# Altium PCB sensorTest.PcbDoc
Units mil, origin at the board's own origin, x right, y up, seen from the top; angles counter-clockwise.
Board outline 3300 x 2970 mil, 2 copper layers (Top Layer, Bottom Layer); 44 components, 33 nets, 167 pads, 15 vias.
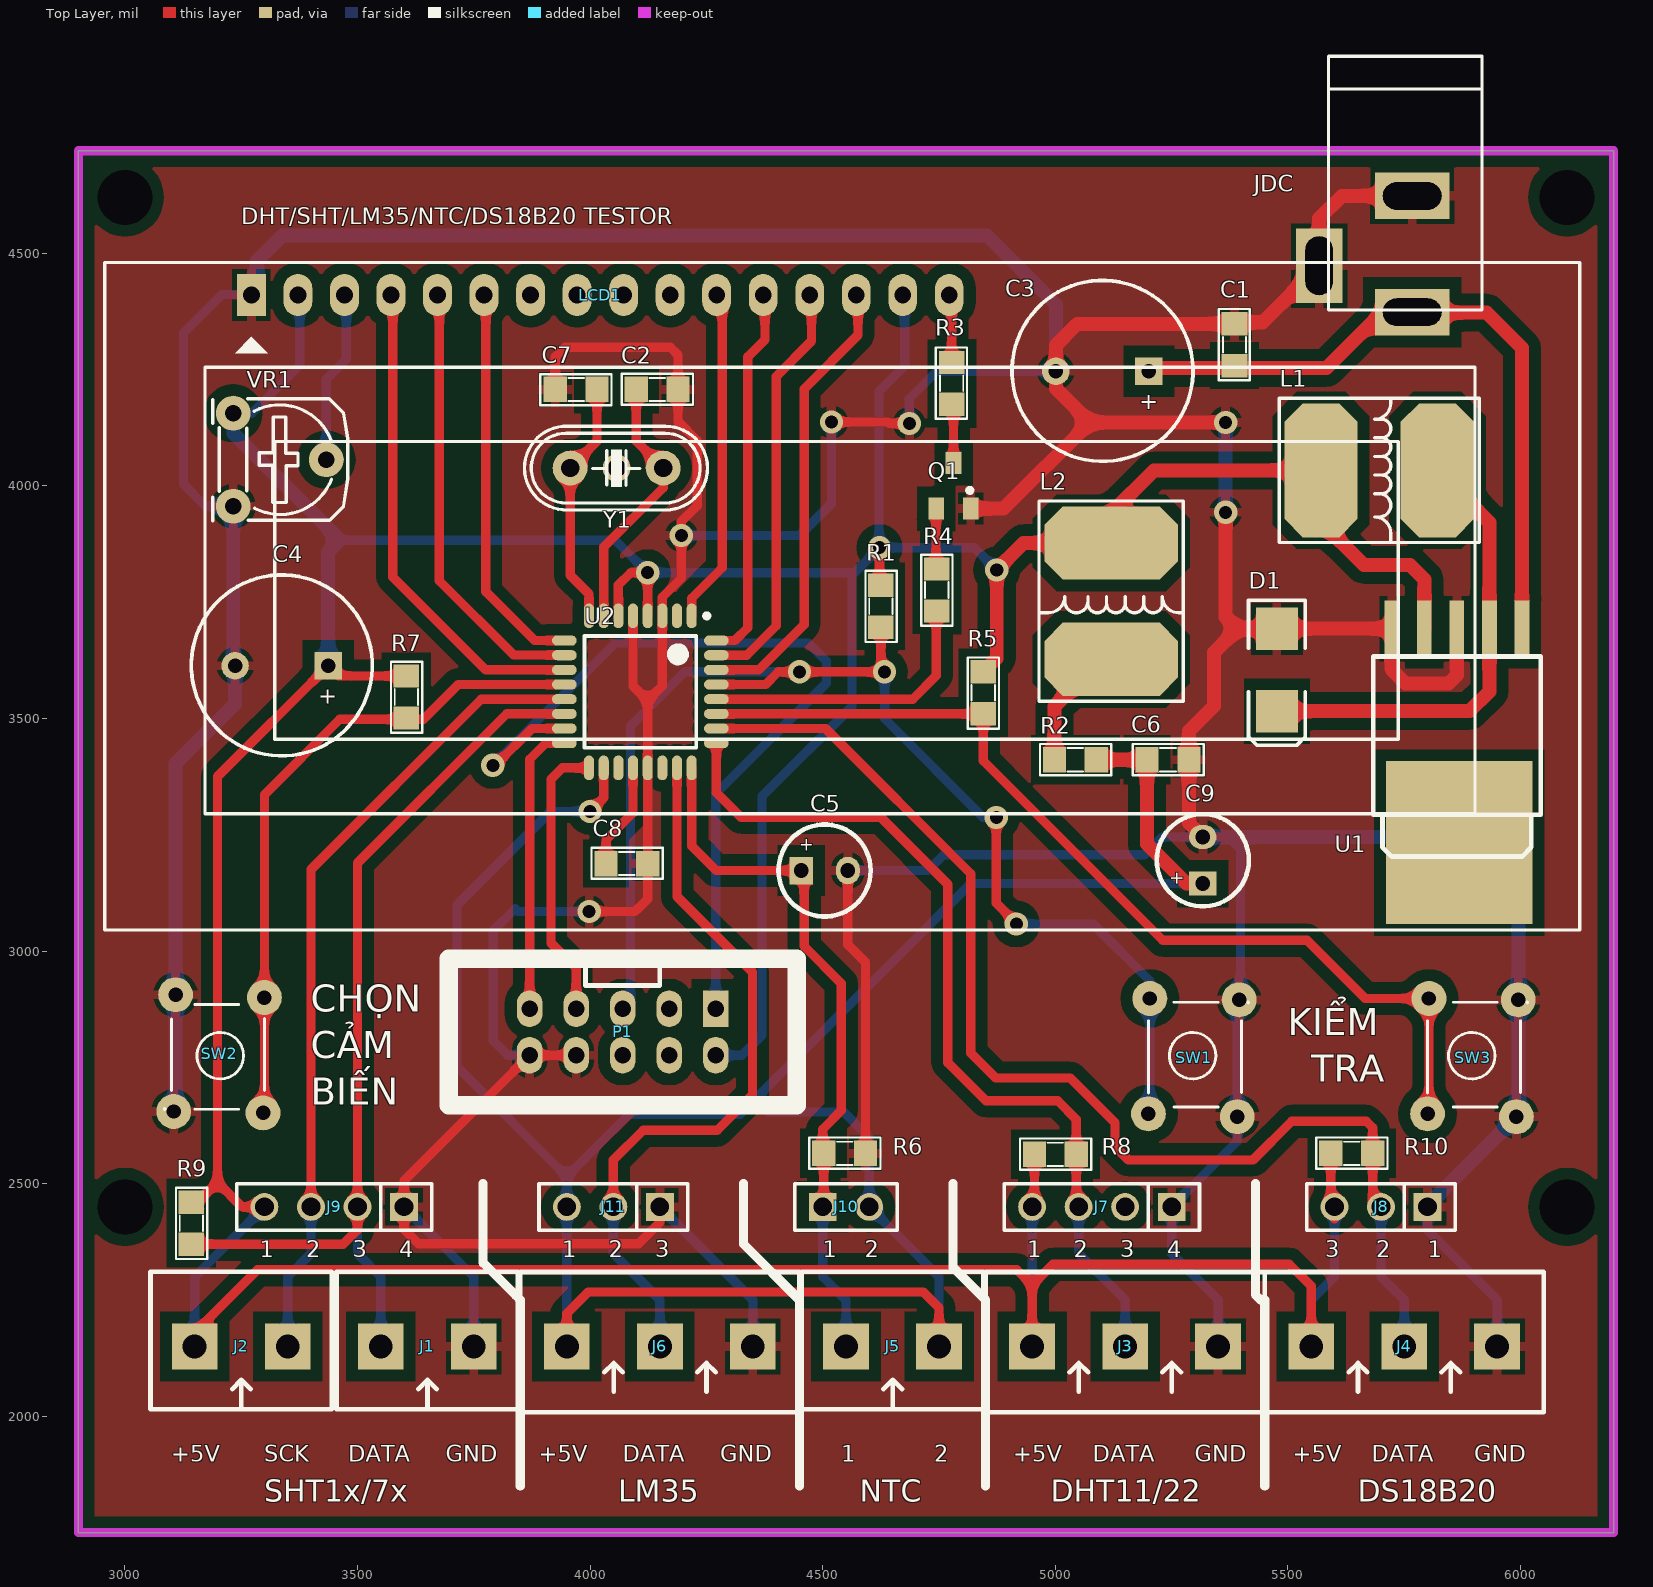
[diagram p0: Top Layer view]
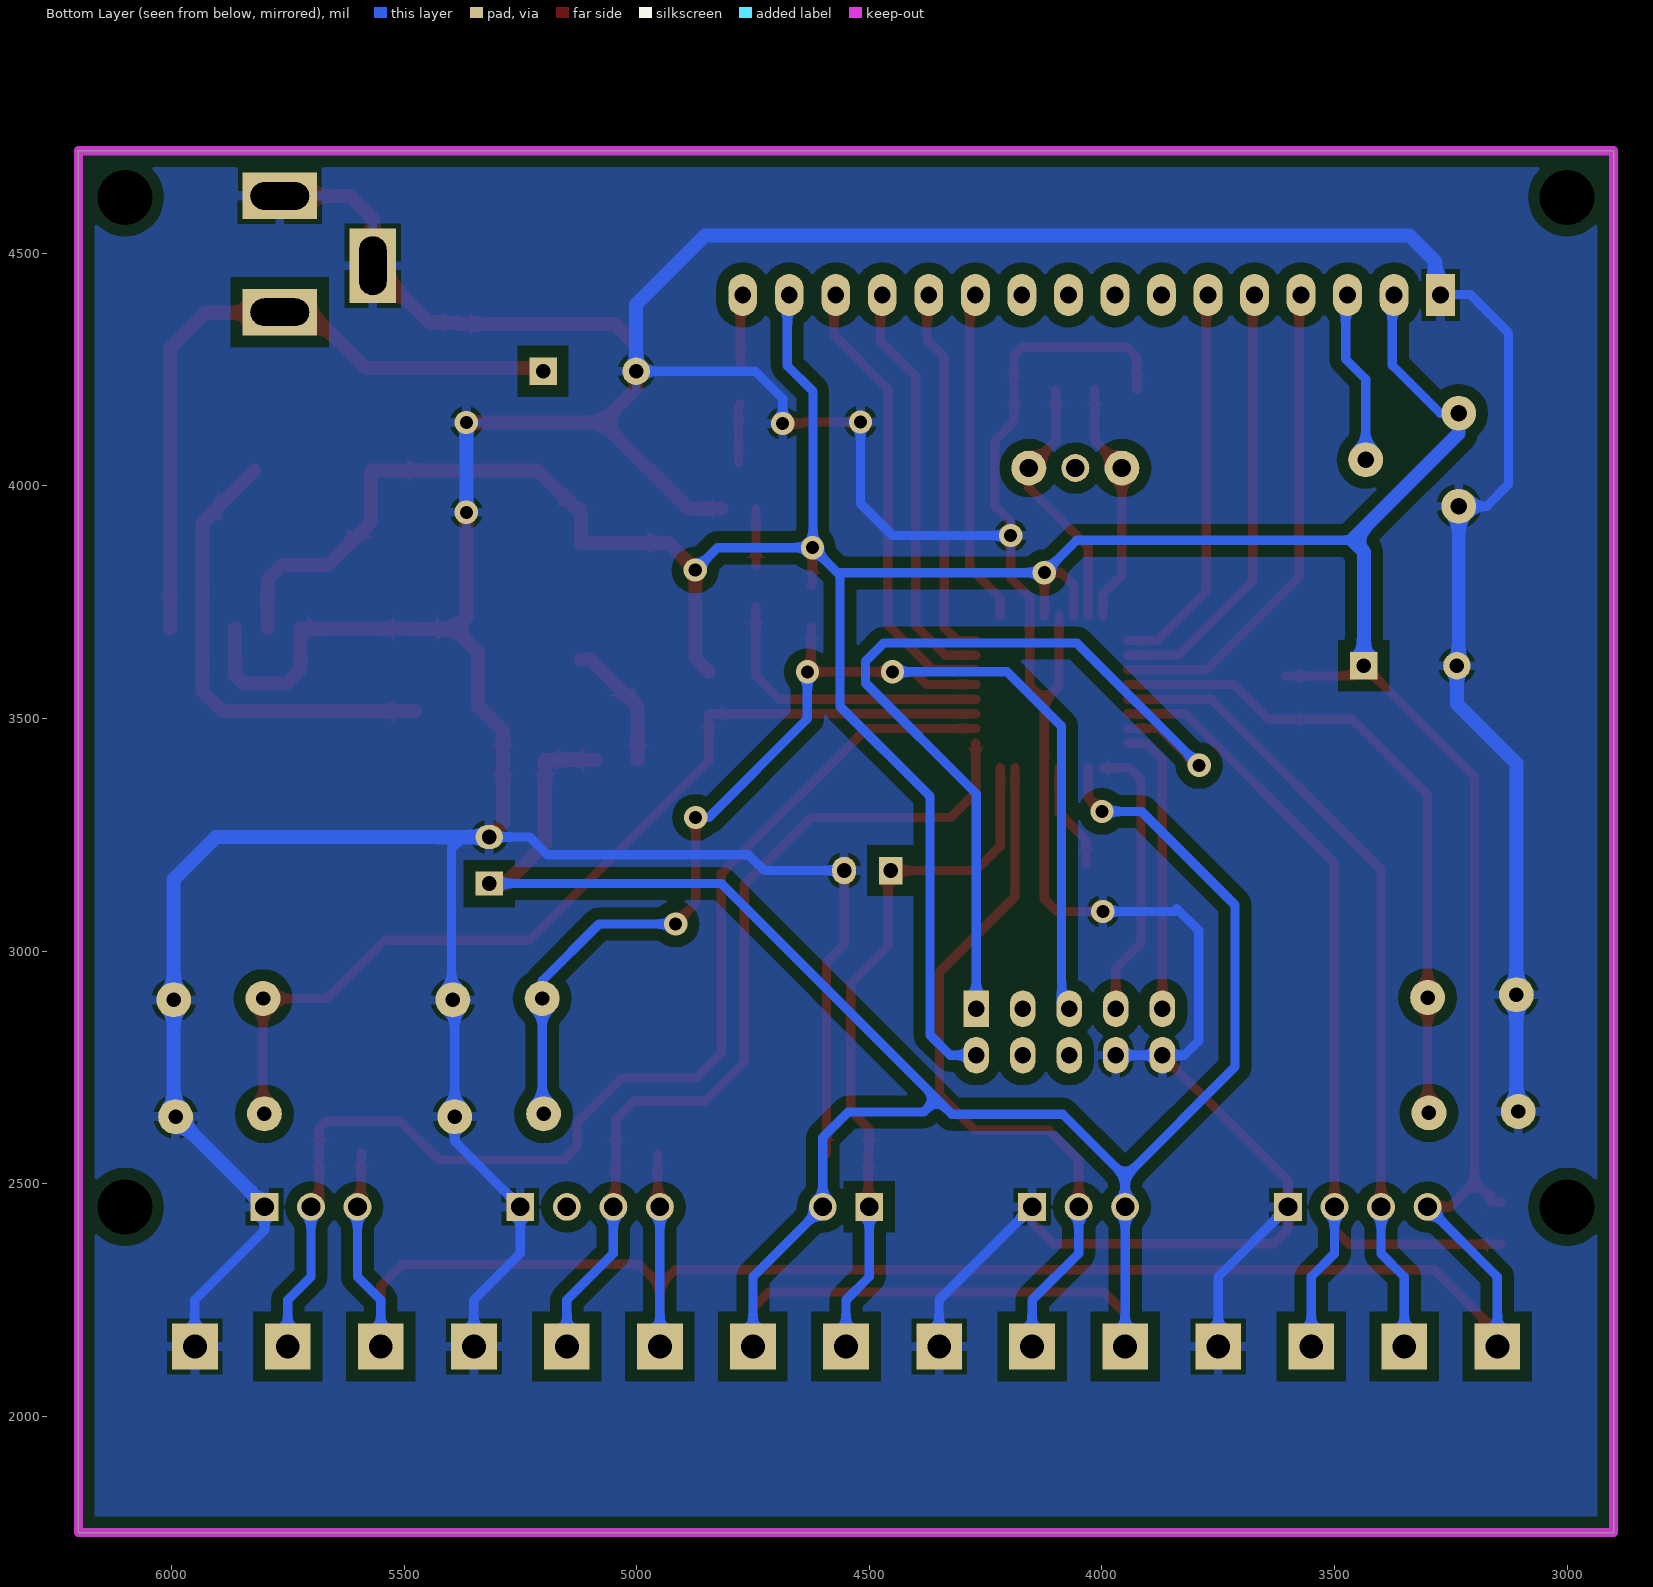
[diagram p1: Bottom Layer view, seen from below]
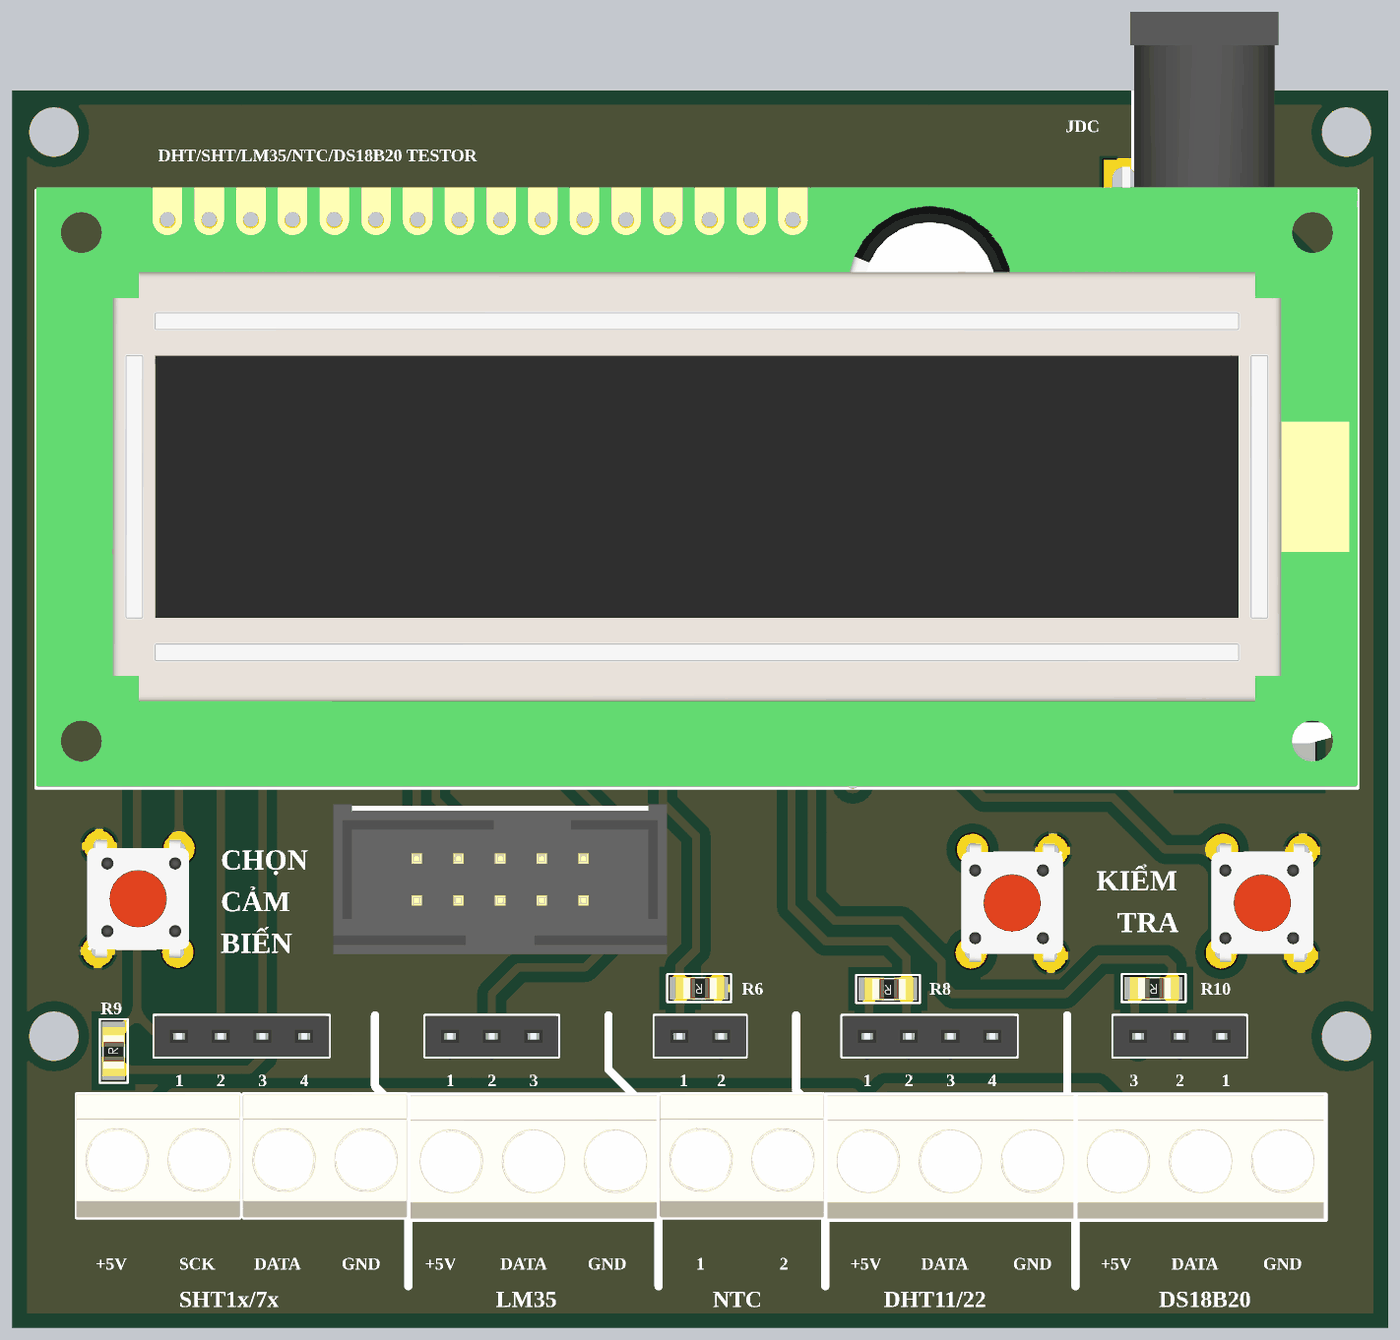
[diagram p2: 3D render of the assembled board from above, using the file's embedded part models]

## Layer stack, top to bottom
Top Solder: solder mask 0.4, Solder Resist, Dk 3.5
Top Layer: signal copper 1.4
Dielectric 1: dielectric 12.6, FR-4, Dk 4.8
Bottom Layer: signal copper 1.4
Bottom Solder: solder mask 0.4, Solder Resist, Dk 3.5

## Board outline
2900,1750 2900,4720 6200,4720 6200,1750

## Design rules (kind name [scope] priority, off if disabled: settings)
Clearance Clearance_2 [InNamedPolygon('Top-GND')] p1: gap=25
Clearance Clearance_1 [InNamedPolygon('Bottom-GND')] p2: gap=25
Clearance [All] p3: gap=30
PolygonConnect PolygonConnect_5 [All vs IsNamedPolygon('Bottom-GND')] p1: connectstyle=Relief reliefconductorwidth=20 reliefentries=4 polygonreliefangle="90 Angle" airgapwidth=10
PolygonConnect PolygonConnect_4 [All vs IsNamedPolygon('Top-GND')] p2: connectstyle=Relief reliefconductorwidth=20 reliefentries=4 polygonreliefangle="90 Angle" airgapwidth=10
PolygonConnect PolygonConnect_3 [All vs IsNamedPolygon('TOP')] p3: connectstyle=Direct reliefconductorwidth=10 reliefentries=4 polygonreliefangle="90 Angle" airgapwidth=10
PolygonConnect PolygonConnect_2 [All vs IsNamedPolygon('TOP')] p4: connectstyle=Direct reliefconductorwidth=10 reliefentries=4 polygonreliefangle="90 Angle" airgapwidth=10
PolygonConnect PolygonConnect_1 [All vs IsNamedPolygon('BOTTOM')] p5: connectstyle=Direct reliefconductorwidth=10 reliefentries=4 polygonreliefangle="90 Angle" airgapwidth=10
PolygonConnect [All] p6: connectstyle=Relief reliefconductorwidth=10 reliefentries=4 polygonreliefangle="90 Angle" airgapwidth=10
RoomDefinition sensorTest [InComponentClass('sensorTest')] p1: confinementstyle=ConfineIn formatcopy=TRUE lockcomponents=FALSE outline 0,0 2000,0 2000,1000 0,1000
RoutingVias [All] p1: holewidth=28 width=50 viastyle="Through Hole" minholewidth=28 minwidth=50 maxholewidth=28 maxwidth=50
SolderMaskExpansion [All] p1: expansion=4
Width [All] p1: maxlimit=50 minlimit=10 preferedwidth=10
30 further rules are at their usual default settings.

## Components (designator, comment, footprint, x,y, rotation, side; value= is the part's Value field where it differs from the comment)
C1 "100nF" "Tu 0805" 5385,4303 r270 top
C2 "22pF" "Tu 0805" 4144,4207 r180 top
C3 "680uF" C10mm 5101,4246 r180 top
C4 "220uF" C10mm 3337,3613 r180 top
C5 "10uF" C5mm 4504,3173 r0 top
C6 "100nF" "Tu 0805" 5242,3411 r180 top
C7 "22pF" "Tu 0805" 3970,4207 r0 top
C8 "100nF" "Tu 0805" 4079,3188 r180 top
C9 "10uF" C5mm 5317,3195 r90 top
D1 "SS34" SMB 5476,3604 r270 top
J1 "SHT" KF2-5.08 3650,2150 r180 top
J2 "SHT" KF2-5.08 3250,2150 r180 top
J3 "DHT" KF3-5.08 4950,2150 r0 top
J4 "DS18" KF3-5.08 5550,2150 r0 top
J5 "NTC" KF2-5.08 4650,2150 r180 top
J6 "LM35" KF3-5.08 3950,2150 r0 top
J7 "DHT" JP4-C1T 5250,2450 r180 top
J8 "DS18" JP3-C1T 5800,2450 r180 top
J9 "JP4" JP4-C1T 3600,2450 r180 top
J10 "NTC" JP2-C1T 4500,2450 r0 top
J11 "JP3" JP3-C1T 4150,2450 r180 top
JDC "9VDC" DC-IN 5667,4498 r270 top
L1 "100uH" "Cuon Cam 7.5x7x5" 5846,4033 r90 top
L2 "100uH" "Cuon Cam 7.5x7x5" 5120,3602 r0 top
LCD1 "LCD16x2A" LCD16X2 3272,4410 r0 top
P1 "CABLE 10" "CABLE 10" 4270,2876 r180 top
Q1 "C1815" SOT23B 4781,4000 r0 top
R1 "10k" "Tro SMD 0805" 4625,3741 r90 top
R2 "10" "Tro SMD 0805" 5043,3411 r180 top
R3 "10" "Tro SMD 0805" 4777,4220 r270 top
R4 "2k7" "Tro SMD 0805" 4745,3776 r90 top
R5 "10k" "Tro SMD 0805" 4845,3555 r90 top
R6 "10k" "Tro SMD 0805" 4547,2565 r180 top
R7 "10k" "Tro SMD 0805" 3605,3546 r90 top
R8 "5k" "Tro SMD 0805" 5000,2563 r180 top
R9 "10k" "Tro SMD 0805" 3143,2415 r90 top
R10 "5k" "Tro SMD 0805" 5637,2565 r180 top
SW1 "SW" SW4 5200,2650 r90 top
SW2 "SW" SW4 3300,2900 r270 top
SW3 "SW" SW4 5800,2650 r90 top
U1 "LM2576T-5.0" LM2576SSMD 6043,3633 r180 top
U2 "ATmega8-16AC" 32A_L 4108,3557 r270 top
VR1 "10K" VR 3233,4156 r270 top
Y1 "16MHz" XT2 4057,4038 r0 top

## Footprints (in the part's own frame and the unit in brackets; to place one, negate y for a bottom-side part, rotate by r counter-clockwise, add the part's x,y. Pads: shape width x height; smd on the part's side, far side on the other; paste and mask are expansions set on the pad)
32A_L [mm] "Thin QFP, 32-Leads, Body 7x7mm, Pitch 0.8mm, IPC High Density"
  oval 1.35x0.55 smd: 1(-4.15,2.8) 2(-4.15,2) 3(-4.15,1.2) 4(-4.15,0.4) 5(-4.15,-0.4) 6(-4.15,-1.2) 7(-4.15,-2) 8(-4.15,-2.8) 17(4.15,-2.8) 18(4.15,-2) 19(4.15,-1.2) 20(4.15,-0.4) 21(4.15,0.4) 22(4.15,1.2) 23(4.15,2) 24(4.15,2.8)
  oval 0.55x1.35 smd: 9(-2.8,-4.15) 10(-2,-4.15) 11(-1.2,-4.15) 12(-0.4,-4.15) 13(0.4,-4.15) 14(1.2,-4.15) 15(2,-4.15) 16(2.8,-4.15) 25(2.8,4.15) 26(2,4.15) 27(1.2,4.15) 28(0.4,4.15) 29(-0.4,4.15) 30(-1.2,4.15) 31(-2,4.15) 32(-2.8,4.15)
  silkscreen extent -4.27,-3.05 3.05,3.75, body extent -3.5,-3.5 3.5,3.5, height 1.2
C5mm [mm]
  rect 1.3x1.5 hole 0.8: 1(-1.27,0)
  oval 1.3x1.5 hole 0.8: 2(1.27,0)
  silkscreen extent -2.51,-2.51 2.51,2.51, body extent -2.5,-2.5 2.49,2.5, height 11.01
C10mm [mm]
  rect 1.5x1.5 hole 0.8: 1(-2.54,0)
  round 1.5 hole 0.8: 2(2.54,0)
  silkscreen extent -4.95,-4.96 4.93,4.92, body extent -5,-5 4.97,5, height 20.01
"CABLE 10" [mm] "Connector; Header; 5x2 Position"
  rect 1.4x2 hole 0.9: 1(0,0)
  oval 1.4x2 hole 0.9: 2(0,2.54) 3(2.54,0) 4(2.54,2.54) 5(5.08,0) 6(5.08,2.54) 7(7.62,0) 8(7.62,2.54) 9(10.16,0) 10(10.16,2.54)
  silkscreen extent -4.42,-2.73 14.58,5.27, body extent -5.08,-3.3 15.24,5.84, height 9.86
"Cuon Cam 7.5x7x5" [mm]
  oct 7.3x4 smd: 1(0,0.635) 2(0,6.985)
  silkscreen extent -3.94,-1.65 3.94,9.27, body extent -3.5,0.07 3.5,7.8, height 5.02
DC-IN [mil] "Jac DC input"
  rect 100x160 hole 59.06 slot 125.98 at 90 deg: 1(125,100) 2(-125,100)
  rect 160x100 hole 59.06 slot 125.98 at 0 deg: 3(25,-100)
  silkscreen extent -425,-80 120,250, body extent -410,-105 134,269, height 434
JP2-C1T [mm] "2 row, straight, gold plating"
  rect 1.52x1.52 hole 1.02: 1(0,0)
  round 1.52 hole 1.02: 2(2.54,0)
  silkscreen extent -1.52,-1.27 4.06,1.27, body extent -1.52,-1.25 4.06,1.25, height 8.51
JP3-C1T [mm] "3 row, straight, gold plating"
  rect 1.52x1.52 hole 1.02: 1(0,0)
  round 1.52 hole 1.02: 2(2.54,0) 3(5.08,0)
  silkscreen extent -1.52,-1.27 6.6,1.27, body extent -1.52,-1.25 6.6,1.25, height 8.51
JP4-C1T [mm] "4 row, straight, gold plating"
  rect 1.52x1.52 hole 1.02: 1(0,0)
  round 1.52 hole 1.02: 2(2.54,0) 3(5.08,0) 4(7.62,0)
  silkscreen extent -1.52,-1.27 9.14,1.27, body extent -1.52,-1.25 9.14,1.25, height 8.51
KF2-5.08 [mm]
  rect 2.5x2.5 hole 1.3: 1(-2.54,0) 2(2.54,0)
  silkscreen extent -4.95,-4.08 4.95,3.43, body extent -5,-4.07 5,3.43, height 10
KF3-5.08 [mm]
  rect 2.5x2.5 hole 1.3: 1(0,0) 2(5.08,0) 3(10.147,0)
  silkscreen extent -2.54,-3.58 12.7,4.06, body extent -2.42,-3.51 12.58,3.99, height 10
LCD16X2 [mil] "LCD dipslay 16x2, 16 pin"
  rect 62x90 hole 36: 1(0,0)
  oval 62x90 hole 36: 2(100,0) 3(200,0) 4(300,0) 5(400,0) 6(500,0) 7(600,0) 8(700,0) 9(800,0) 10(900,0) 11(1000,0) 12(1100,0) 13(1200,0) 14(1300,0) 15(1400,0) 16(1500,0)
  silkscreen extent -315,-1365 2855,70, body extent -315,-1360 2855,77, height 886
LM2576SSMD [mil]
  rect 31.5x120 smd: 1(40,-60) 2(110,-60) 3(180,-60) 4(250,-60) 5(320,-60)
  rect 314.96x350 smd: 6(175,400)
  silkscreen extent 0,0 360,430, body extent -20,-72 380,480, height 180
SMB [mm] "DO-214-AA/SMB; 2 C-Bend Leads; Body 5.3 x 3.6 mm, inc. leads (LxW)"
  rect 2.3x2.3 smd: 1(-2.25,0) 2(2.25,0)
  silkscreen extent -3.8,-1.55 4.1,1.55
SOT23B [mm] "SOT 23B"
  rect 0.85x1.2 smd: 1(0.94,-1.245) 2(0,1.25) 3(-0.95,-1.25)
  silkscreen extent 0.77,-0.38 1.02,-0.13, body extent -1.5,-1.3 1.5,1.2, height 1.06
SW4 [mil] "SW button 4pin, 250 x250 mil"
  round 75 hole 31: 1(0,0) 2(245,-195) 3(248,-3) 4(-6,-191)
  silkscreen extent 15,-215 240,0, body extent -36,-220 276,24, height 276
"Tro SMD 0805" [mil]
  rect 50x55 smd: 1(-45,0) 2(45,0)
  silkscreen extent -77,-34 76,33, body extent -62,-28 56,27, height 21
"Tu 0805" [mil] "Compoment SMD 80x50mil"
  rect 50x55 smd: 1(-45,0) 2(45,0)
  silkscreen extent -77,-34 76,33, body extent -40,-27 40,23, height 24
VR [mil] "Resistor Variable"
  round 75 hole 35: 1(0,0) 2(100,200) 3(200,0)
  silkscreen extent -31,-44 231,246, body extent -87,-30 307,372, height 165
XT2 [mm] "Footpin for Crystal 2 pin"
  round 1.524 hole 1: 0(0,0)
  round 1.905 hole 1: 1(-2.54,0) 2(2.54,0)
  silkscreen extent -5.03,-2.29 4.96,2.29, body extent -5.93,-2.36 5.42,2.29, height 3.5

## Part data
C1 C6 C7 C8: library part "CAP 0805"
C2: library part "Tu 0805"
C3 C4: library part "Cap Pol 12mm", "Polarized Capacitor (Axial)"
C5 C9: library part "Cap Pol 5mm", "Polarized Capacitor (Axial)"
D1: library part "Diode SS34 3A 40V SMA ( 1N5822 SS34A)_MH", "Diode SS34 3A 40V SMA ( 1N5822 SS34A)"
J1 J2 J5: library part KF2
J3 J4 J6: library part KF3
J7: library part JP4, "WR-PHD 2.54 mm Angled Socket Header"
J8: library part JP3, "WR-PHD 2.54 mm Angled Socket Header"
J9 J11: "WR-PHD 2.54 mm Angled Socket Header"
J10: library part JP2, "WR-PHD 2.54 mm Angled Socket Header"
JDC: library part DCIN, "Jac DC input"
L1 L2: library part "CUON CAM 100uH_SMD", "Dán"
LCD1: library part LCD16x2, "LCD dipslay 16 char, 2 line"
P1: "Header, 5-Pin, Dual row"
Q1: "NPN 600mW, ECB"
R1 R2 R3 R4 R5 R6 R7 R8 R9 R10: library part Res, "Resistor 1/4W"
SW1 SW2 SW3: library part SW4, "Switch button 4 pin"
U1: "SIMPLE SWITCHER; 3A Step-Down Voltage Regulator"
U2: "8-Bit AVR Microcontroller with 8K Bytes of In-System Programmable Flash Memory"
VR1: library part VR, "Var Resistor"
Y1: library part Crystal, "Crystal Oscillator"

## Free pads (board coordinates)
  round 60 hole 118.11: 0(3000,4620) 1(6100,4620) 2(6100,2450) 3(3000,2450)

## Via types
v1: diameter 50, hole 28, Top Layer to Bottom Layer, tented both sides, 15 vias

## Nets (pads, with @x,y where several pads share a name; then routed paths per layer and width w, separated by ;. In a path a pad name is that pad's centre, name@x,y a point inside that pad or via, vN(x,y) a via of type N, cw(c..) or ccw(c..) an arc to the next point about the centre after c; other vN are vias at no path point)
BLIGHT: R4.1 U2.28 | length 641.6
  Top Layer w20: U2.28 4693.25,3541.25 4744,3592 R4.1@4744,3740
DHT: J3.2 J7.3 R8.1 U2.25 | length 1926.6
  Top Layer w20: U2.25 4271.39,3340.61 4325,3287 4625,3287 4769,3143 4769,2760 4851,2678 5005,2678 5045,2638 R8.1 5045,2455 J7.3
  Bottom Layer w20: J7.3 5050,2350 5150,2250 J3.2
DS18B20: J4.2 J8.2 R10.1 U2.26 | length 2563
  Top Layer w20: U2.26 4505.74,3478.26 4818,3166 4818,2781 4872,2727 5032,2727 5128,2631 5128,2580 5157,2551 5425,2551 5508,2634 5668,2634 5682,2620 R10.1 J8.2@5682,2468
  Bottom Layer w20: J8.2 5700,2300 5750,2250 J4.2
FILTER: C6.2 C9.1 J5.1 J6.1 J10.2 J11.3 R2.1 U2.18 | length 5372.6
  Top Layer w20: J6.1 3950,2221 3996,2267 4716,2267 4750,2233 J5.1 ; v1(4000,3300) 4029.26,3329.26 U2.18
  Top Layer w30: R2.1 C6.2 5197,3230 5282,3145 C9.1
  Bottom Layer w20: J6.1 J11.3 3950,2515 ; v1(4000,3300) 3915,3300 3714,3099 3714,2751 3950,2515 ; J5.1 4750,2300 J10.2 4600,2599 4545,2654 4383,2654 4355,2682 ; C9.1 4818,3145 4355,2682 ; 3950,2515 4084,2649 4322,2649 4355,2682
GND: C1.1 C2.1 C3.2 C4.2 C5.2 C6.1 C7.1 C8.1 C9.2 D1.1 J1.1 J3.3 J4.3 J6.3 J7.1 J8.1 J9.1 J11.1 JDC.2 JDC.3 LCD1.1 P1.8 P1.10 Q1.1 R6.1 SW1.2 SW1.4 SW2.2 SW2.4 SW3.2 SW3.4 U1.3 U1.5 U2.3 U2.5 U2.21 VR1.3 | length 17514.1
  Top Layer w20: C7.1 3925,4277 3946,4298 4172,4298 4189,4281 C2.1 4189,4138 4230,4097 4230,3957 4196,3923 v1(4196,3893) 4196,3801 4155.24,3760.24 U2.3 4155.24,3569.75 4123.75,3538.25 ; P1.8 P1.10 3600,2506 J9.1 3600,2402 3631,2371 4104,2371 4150,2417 J11.1 ; v1(3998,3085) 4096,3085 4102,3091 4102.5,3090.5 4123.75,3111.75 U2.21 4123.75,3538.25 ; U2.5 4092.25,3569.75 4123.75,3538.25 ; v1(4519,4137) 4640,4137 4643,4134 v1(4686,4134) ; C5.2 4554,3014 4592,2976 R6.1
  Top Layer w30: Q1.1 4889,3951 5074,4136 ; 5043,4344 5001,4302 C3.2 5001,4209 5074,4136 ; 5047,4348 C1.1 5388,4351 5445,4351 JDC.3 5567,4574 5616,4623 JDC.2 ; C9.2 5287,3275 C6.1 5287,3473 5341,3527 5341,3642 5391.58,3692.58 ; v1(5366,3943) 5366,3718.17 5391.58,3692.58 ; v1(5366,4136) 5074,4136 ; U1.3 5863,3593 5845,3575 5753,3575 5723,3605 U1.5 5476.42,3693 D1.1 5391.58,3692.58
  Bottom Layer w20: C4.2@3233,3617 C4.2 ; VR1.3 3173,3956 3126,4003 3126,4329 3208,4411 LCD1.1@3276,4411 ; J9.1 3750,2300 J1.1 ; P1.8 P1.10 3823,2776 3792,2807 3792,3044 3839,3091 3845,3085 v1(3998,3085) ; J11.1 4350,2250 J6.3@4350,2150 ; v1(4196,3893) 4450,3893 4519,3962 v1(4519,4137) ; C5.2 4726,3173 4760,3207 5192,3207 5230,3245 C9.2 ; v1(4686,4134) 4686,4185 4685,4186 4745,4246 C3.2 ; J3.3@5350,2150 5350,2250 5250,2350 J7.1 5391,2591 SW1.4 5391,2891 SW1.2 5398,2898 5398,3221 5374,3245 ; J8.1 5800,2400 5950,2250 J4.3@5950,2150
  Bottom Layer w30: SW2.2 3109,2659 SW2.4 3109,3403 3237,3531 C4.2 ; C4.2@3233,3617 VR1.3 ; LCD1.1@3284,4411 3284,4483 3339,4538 4853,4538 5001,4390 C3.2 ; C9.2 5374,3245 5904,3245 5995,3154 SW3.2 SW3.4@5995,2648 ; v1(5366,3943) v1(5366,4136) v1@5373,4143 ; J8.1 5800,2453 SW3.4
LCD_D4: LCD1.11 U2.1 | length 721.2
  Top Layer w20: U2.1 4218.24,3758.24 4284,3824 4284,4403 LCD1.11@4276,4411
LCD_D5: LCD1.12 U2.32 | length 810.4
  Top Layer w20: U2.32 4311.24,3667.24 4339,3695 4339,4277 4376,4314 LCD1.12@4376,4411
LCD_D6: LCD1.13 U2.31 | length 898.3
  Top Layer w20: U2.31 4336.74,3635.74 4400,3699 4400,4235 4476,4311 LCD1.13@4476,4411
LCD_D7: LCD1.14 U2.30 | length 986.2
  Top Layer w20: U2.30 4362.24,3604.24 4460,3702 4460,4208 4576,4324 LCD1.14@4576,4411
LCD_EN: LCD1.6 U2.9 | length 851
  Top Layer w20: LCD1.6@3776,4411 3776,3772 3880.76,3667.24 U2.9
LCD_RS: LCD1.4 U2.11 | length 1058.4
  Top Layer w20: LCD1.4@3576,4411 3576,3804 3775.76,3604.24 U2.11
LCD_RW: LCD1.5 U2.10 | length 950
  Top Layer w20: LCD1.5@3676,4411 3676,3796 3835.59,3636.41 3943.94,3636.41 U2.10
LM35: J6.2 J11.2 U2.23 | length 1569.2
  Top Layer w20: J11.2 4050,2551 4114,2615 4273,2615 4349,2691 4349,2955 4186.74,3117.26 U2.23
  Bottom Layer w20: J11.2 4050,2350 4150,2250 J6.2
MENU: R7.1 SW2.1 SW2.3 U2.12 | length 1427.9
  Top Layer w20: SW2.3 3300,2655 SW2.1 3300,3336 3462,3498 3642,3498 3716.75,3572.75 U2.12
MISO: P1.9 U2.16 | length 625
  Top Layer w20: P1.9 3870,3412 3904.76,3446.76 U2.16
MOSI: P1.1 U2.15 | length 1873.9
  Top Layer w20: v1(3791,3399) 3796,3399 3875.26,3478.26 U2.15
  Bottom Layer w20: v1(3791,3399) 4054,3662 4468.64,3662 4508,3622.64 4508,3576 4270,3338 P1.1
NetC1_2: C1.2 C3.1 JDC.1 U1.1 | length 1489.5
  Top Layer w30: C3.1 5208,4253 5583,4253 5703,4373 JDC.1 5768,4372 5927,4372 6003,4296 U1.1
NetC8_2: C8.2 U2.20 | length 229.7
  Top Layer w20: C8.2 4034,3239 4092.25,3297.25 U2.20
NetD1_2: D1.2 L1.1 U1.2 | length 996
  Top Layer w30: D1.2 5890.42,3515.42 5933,3558 U1.2 5933,3921 L1.1
NetL2_1: L2.1 R2.2 | length 278.8
  Top Layer w30: R2.2 4998,3526 5099,3627 L2.1
NetLCD1_3: LCD1.3 VR1.2 | length 372.8
  Bottom Layer w20: VR1.2 3433,4229 3476,4272 LCD1.3@3476,4411
NetLCD1_16: LCD1.16 R3.1 | length 146.4
  Top Layer w20: LCD1.16@4776,4411 4777,4410 R3.1
NetQ1_2: Q1.2 R3.2 | length 127.4
  Top Layer w20: R3.2 4781,4171 Q1.2
NetQ1_3: Q1.3 R4.2 | length 121
  Top Layer w20: Q1.3 4743.6,3830.4 R4.2@4744,3830
NTC: C5.1 J5.2 J10.1 R6.2 U2.24 | length 1523
  Top Layer w20: U2.24 4218.24,3225.76 4271,3173 C5.1 4460,3167 4460,3010 4540,2930 4540,2657 4500,2617 4500,2567 R6.2 4502,2452 J10.1
  Bottom Layer w20: J10.1 4500,2300 4550,2250 J5.2
RESET: P1.5 R1.1 SW1.1 SW1.3 U2.29 | length 2798.6
  Top Layer w20: U2.29 4377.25,3572.75 4404.5,3600 v1(4450,3600) v1(4633,3600) ; R1.1 4625,3614 4639,3600 v1@4640,3601 ; v1(4873,3287) 4873,3103 4917,3059 v1(4916,3058)
  Bottom Layer w20: P1.5 4087,2893 4087,3483 4204,3600 v1(4450,3600) ; v1(4633,3600) 4633,3499 4845,3287 v1(4873,3287) ; v1(4916,3058) 5081,3058 5203,2936 SW1.3 SW1.1@5203,2653
SCK: P1.7 U2.17 | length 607.3
  Top Layer w20: P1.7 3970,2963 3916,3017 3916,3369 3940.61,3393.61 U2.17
SHT_DATA: J1.2 J9.2 R9.1 U2.14 | length 2057
  Top Layer w20: R9.1 3469,2370 3500,2401 ; 3500,2400 3500,2401 ; U2.14 3820.76,3509.76 3500,3189 J9.2 3500,2401
  Bottom Layer w20: J9.2 3500,2350 3550,2300 J1.2
SHT_SCK: J2.1 J9.3 U2.13 | length 1742
  Top Layer w20: J9.3 3400,3175 3766.25,3541.25 U2.13
  Bottom Layer w20: J2.1 3350,2300 3400,2350 J9.3
TEST: R5.1 SW3.1 SW3.3 U2.27 | length 2093.6
  Top Layer w20: U2.27 4844.76,3509.76 R5.1 4845,3409 5231,3023 5541,3023 5666,2898 SW3.3 5803,2653 SW3.1
VCC: C4.1 J2.2 J3.1 J4.1 J7.4 J8.3 J9.4 L1.2 L2.2 LCD1.2 LCD1.15 P1.2 R1.2 R5.2 R7.2 R8.2 R9.2 R10.2 U1.4 U2.4 U2.6 VR1.1 | length 11711.3
  Top Layer w20: R9.2 3156,2460 3199,2503 ; J2.2 3150,2180 3285,2315 4917,2315 4950,2282 ; J9.4 3252,2450 3199,2503 ; R7.2 3459,3591 C4.1 3199,3375 3199,2503 ; U2.6 4060.76,3786.76 4087.25,3813.25 v1(4123.75,3813.25) U2.4 ; v1(4622,3867) 4622,3789 R1.2 ; J3.1 4950,2282 ; J7.4 4955,2455 R8.2 ; J4.1 5550,2280 5503,2327 4995,2327 4950,2282 ; R10.2 5592,2458 J8.3 J8.3@5600,2424
  Top Layer w30: R5.2 4874,3629 v1(4874,3819) 4932,3877 L2.2 5120,3941 5212,4033 L1.2 5571,3922 5663,3830 5762,3830 5793,3799 U1.4
  Bottom Layer w20: J2.2 3150,2300 J9.4 ; VR1.1 3273,4156 3376,4259 LCD1.2@3376,4411 ; 3462,3883 4054,3883 v1(4123.75,3813.25) 4562.75,3813.25 ; P1.2 4326,2776 4369.5,2819.5 4369.5,3332.5 4562.75,3525.75 4562.75,3813.25 ; v1@4621,3868 4621,4203 4676,4258 LCD1.15@4676,4411 ; v1@4873,3818 v1(4874,3819) 4826,3867 v1(4622,3867) 4568.25,3813.25 4562.75,3813.25 ; J3.1 J7.4 ; J4.1 5550,2250 5600,2300 J8.3
  Bottom Layer w30: VR1.1 3233,4112 3462,3883 3437,3858 C4.1
XTAL1: C2.2 U2.7 Y1.2 | length 563.6
  Top Layer w20: U2.7 4029.26,3868.26 4157,3996 Y1.2 4099,4096 C2.2
XTAL2: C7.2 U2.8 Y1.1 | length 527.5
  Top Layer w20: U2.8 3997.76,3767.24 3957,3808 Y1.1 4015,4096 C7.2
pads on no net: J7.2 LCD1.7 LCD1.8 LCD1.9 LCD1.10 P1.3 P1.4 P1.6 U1.6 U2.2 U2.19 U2.22 Y1.0

## Polygon pours and split planes (outlines as drawn)
GND on Top Layer "Top-GND" (solid, remove dead copper, pour order 10): 2900,1750 2900,4720 6200,4720 6200,1750
GND on Bottom Layer "Bottom-GND" (solid, remove dead copper, pour order 11): 2900,1750 2900,4720 6200,4720 6200,1750

## Keep-outs
Keep-Out Layer:
  the board outline again, w19.68

## Silkscreen, mask and mechanical layers (free items; w line width, h text height)
Top Overlay:
  lines w19.68: 3770,2500 3770,2330 3840,2260 3850,2250 3850,1950 3850,1850 ; 4330,2500 4330,2370 4450,2250 ; 4450,1850 4450,1950 4450,2250 ; 4450.06,2250.06 4450,2250 ; 4780,2500 4780,2320 4850,2250 4850,1950 4850,1850 ; 5430,2500 5430,2261.06 5441,2250.06 5450.06,2250.06 5450,2250 5450,1950 5450,1850
  text "DHT/SHT/LM35/NTC/DS18B20 TESTOR" at 3250,4550 h60
  text "CHỌN" at 3400,2850 h100
  text "KIỂM" at 5500,2800 h100
  text "CẢM" at 3400,2750 h100
  text "TRA" at 5550,2700 h100
  text "BIẾN" at 3400,2650 h100
  text "1" at 3290,2330 h60
  text "2" at 3390,2330 h60
  text "3" at 3490,2330 h60
  text "4" at 3590,2330 h60
  text "1" at 3940,2330 h60
  text "2" at 4040,2330 h60
  text "3" at 4140,2330 h60
  text "1" at 4500,2330 h60
  text "2" at 4590,2330 h60
  text "1" at 4940,2330 h60
  text "2" at 5040,2330 h60
  text "3" at 5140,2330 h60
  text "4" at 5240,2330 h60
  text "3" at 5580,2330 h60
  text "2" at 5690,2330 h60
  text "1" at 5800,2330 h60
  text "+5V" at 3100,1890 h60
  text "SCK" at 3300,1890 h60
  text "DATA" at 3480,1890 h60
  text "GND" at 3690,1890 h60
  text "+5V" at 3890,1890 h60
  text "DATA" at 4070,1890 h60
  text "GND" at 4280,1890 h60
  text "1" at 4540,1890 h60
  text "2" at 4740,1890 h60
  text "+5V" at 4910,1890 h60
  text "DATA" at 5080,1890 h60
  text "GND" at 5300,1890 h60
  text "+5V" at 5510,1890 h60
  text "DATA" at 5680,1890 h60
  text "GND" at 5900,1890 h60
  text "SHT1x/7x" at 3300,1800 h80
  text "LM35" at 4060,1800 h80
  text "NTC" at 4580,1800 h80
  text "DHT11/22" at 4990,1800 h80
  text "DS18B20" at 5650,1800 h80

## Text inside footprints (layer, text, board x,y; h text height)
C3: Top Overlay "+" at 5221,4206 h60 r180
C4: Top Overlay "+" at 3457,3573 h60 r180
C5: Top Overlay "+" at 4449,3206 h47.24
C9: Top Overlay "+" at 5284,3140 h47.24 r90